# Altium PCB sensor_node1.PcbDoc
Units mil, origin at the board's own origin, x right, y up, seen from the top; angles counter-clockwise.
Board outline 3200 x 2200 mil, 2 copper layers (Top Layer, Bottom Layer); 26 components, 32 nets, 130 pads, 44 vias.
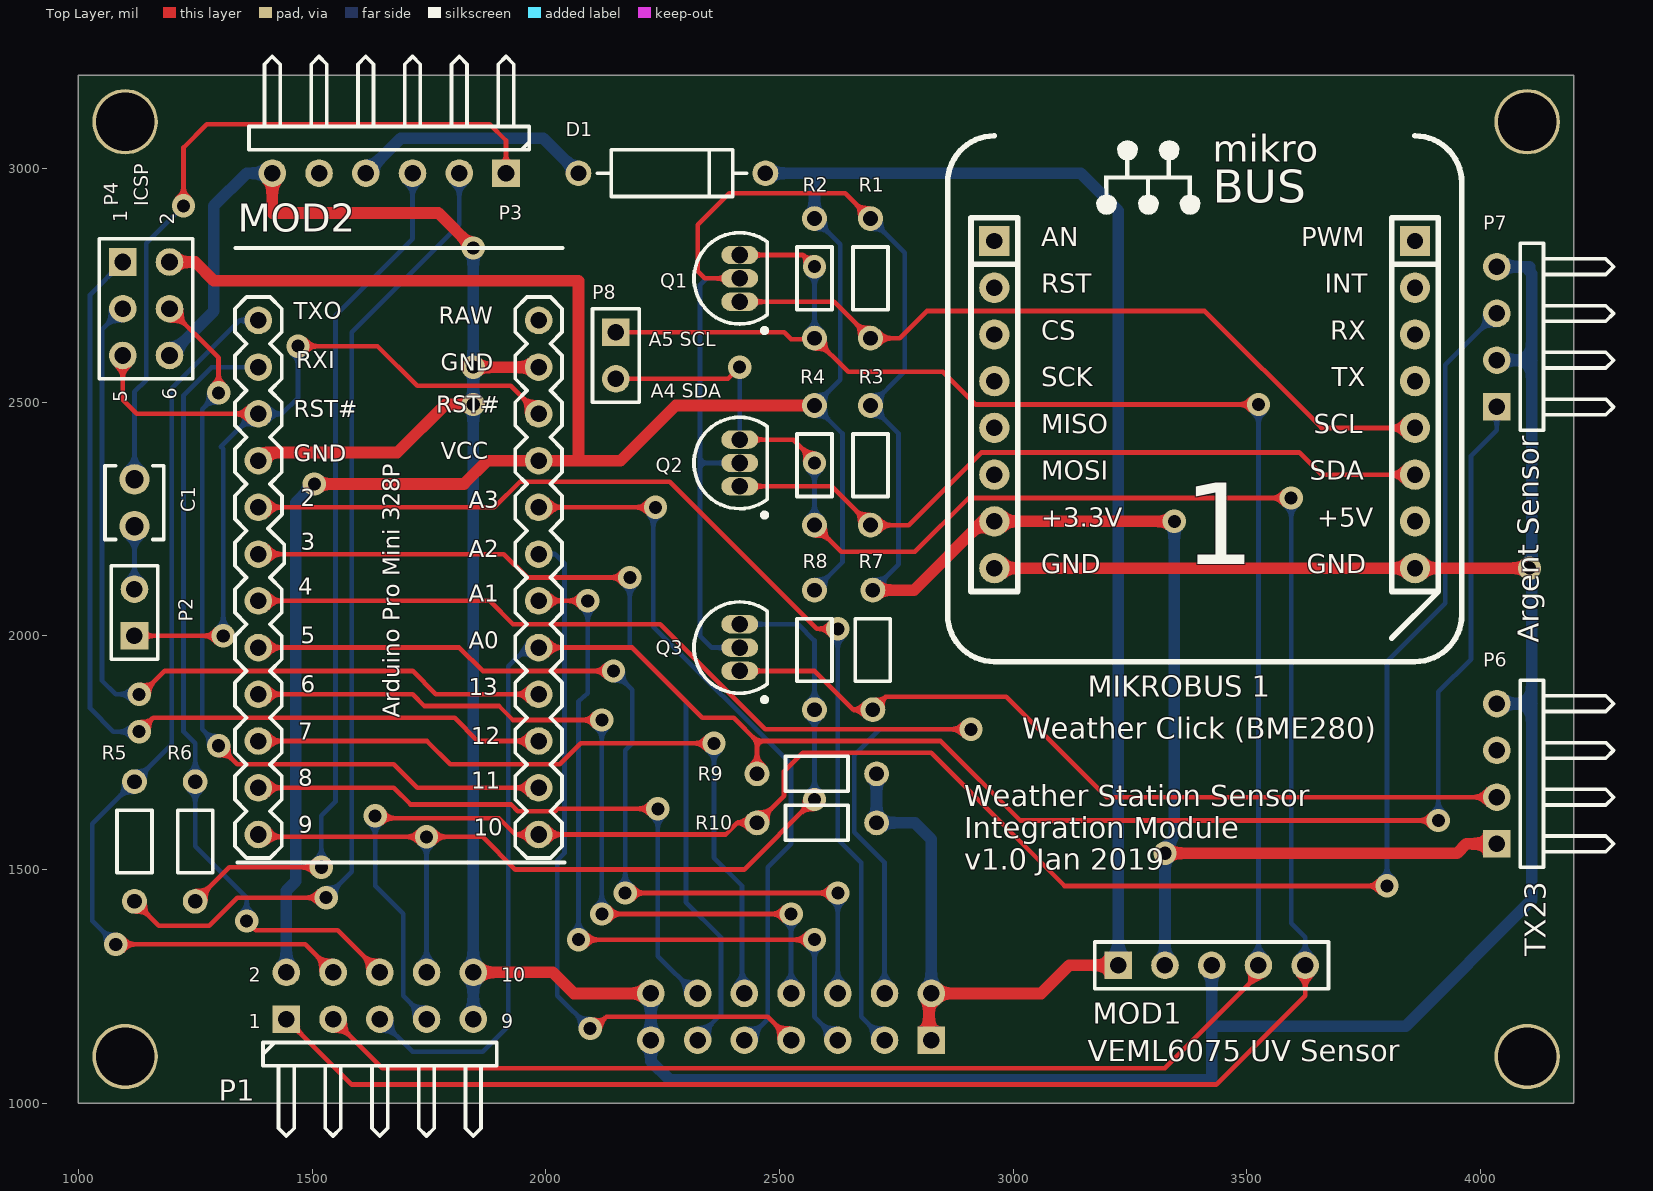
[diagram p0: Top Layer view]
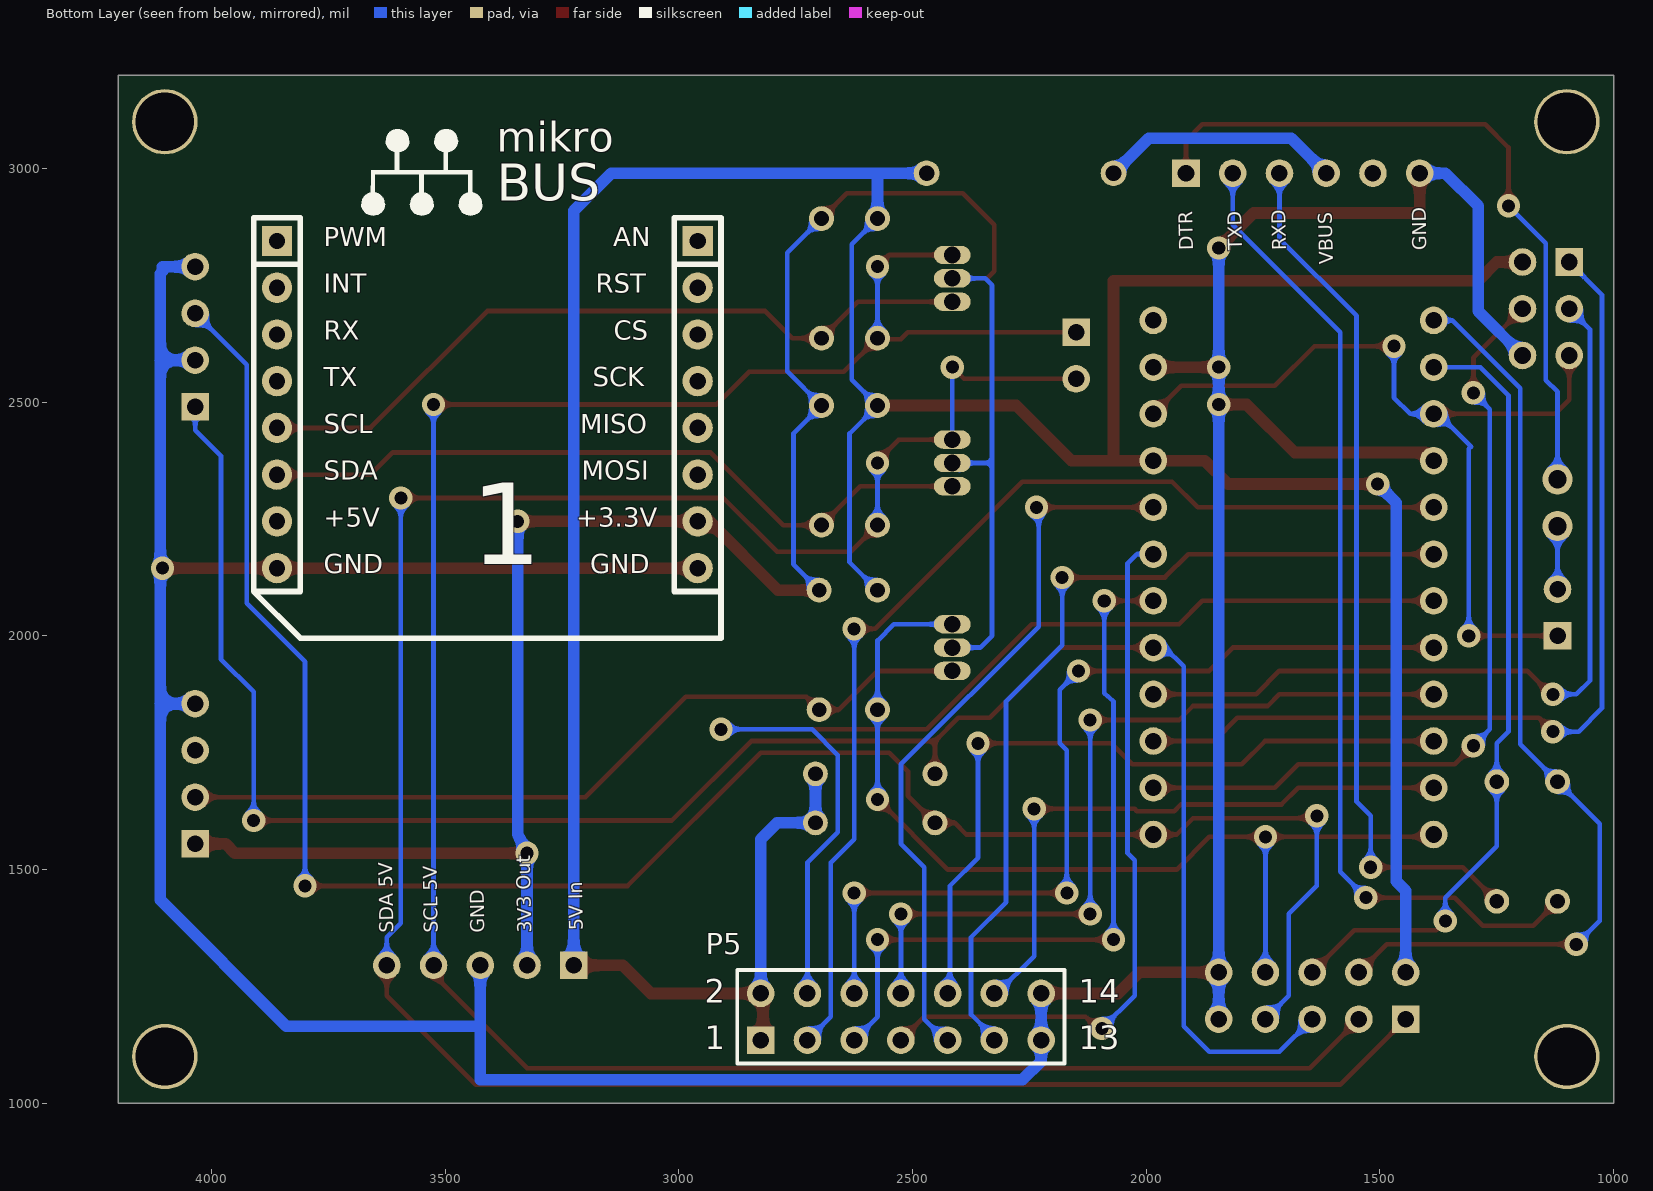
[diagram p1: Bottom Layer view, seen from below]

## Layer stack, top to bottom
Top Solder: solder mask 0.4, Solder Resist, Dk 3.5
Top Layer: signal copper 1.4
Dielectric 1: dielectric 12.6, FR-4, Dk 4.8
Bottom Layer: signal copper 1.4
Bottom Solder: solder mask 0.4, Solder Resist, Dk 3.5

## Board outline
1000,1000 1000,3200 4200,3200 4200,1000

## Design rules (kind name [scope] priority, off if disabled: settings)
Clearance [All] p1: gap=10
HoleSize [All] p1: absolutevalues=TRUE maxlimit=200 minlimit=1 maxpercent=80.000 minpercent=20.000
MinimumSolderMaskSliver [All] p1: minsoldermaskwidth=2
PolygonConnect [All] p1: connectstyle=Relief reliefconductorwidth=10 reliefentries=4 polygonreliefangle="90 Angle" airgapwidth=10
RoutingVias [All] p1: holewidth=28 width=50 viastyle="Through Hole" minholewidth=28 minwidth=50 maxholewidth=28 maxwidth=50
SilkToSilkClearance [All] p1: silktosilkclearance=5
SilkToSolderMaskClearance [IsPad] p1: minsilkscreentomaskgap=2 clearancetoexposedcopper=TRUE
SolderMaskExpansion [All] p1: expansion=4
Width [All] p1: maxlimit=30 minlimit=6 preferedwidth=10
26 further rules are at their usual default settings.

## Components (designator, comment, footprint, x,y, rotation, side; value= is the part's Value field where it differs from the comment)
C1 "Cap" CAPR2.54-4x3.2 1120,2285 r270 top
D1 "1N5817" DIODE-0.4 2270,2990 r0 top
"MIKROBUS 1" "MIKROBUS HOST CONN." "MIKROBUS HOST CONN." 2960,2845 r0 top
MOD1 "veml6075_ada" HDR1X5 3225,1295 r0 top
MOD2 "ProMini 328P" promini 1320.78,2850 r0 top
P1 "Header 5X2H" HDR2X5H 1445,1180 r0 top
P2 "Header 2" HDR1X2 1120,2000 r90 top
P3 "Header 6H" HDR1X6H 1915,2990 r180 top
P4 "Header 3X2" HDR2X3 1095,2800 r270 top
P5 "Header 7X2" HDR2X7 2825,1135 r180 bottom
P6 "Header 4H" HDR1X4H 4035,1555 r90 top
P7 "Header 4H" HDR1X4H 4035,2490 r90 top
P8 "Header 2" HDR1X2 2150,2650 r270 top
Q1 "2N7000" 2N7000-TO92 2415,2765 r0 top
Q2 "2N7000" 2N7000-TO92 2415,2370 r0 top
Q3 "2N7000" 2N7000-TO92 2415,1975 r0 top
R1 "Res3" RES6.5-3.4X1.9 2695,2765 r90 top
R2 "Res3" RES6.5-3.4X1.9 2575,2765 r270 top
R3 "Res3" RES6.5-3.4X1.9 2695,2365 r90 top
R4 "Res3" RES6.5-3.4X1.9 2575,2365 r270 top
R5 "Res3" RES6.5-3.4X1.9 1120,1560 r270 top
R6 "Res3" RES6.5-3.4X1.9 1250,1560 r270 top
R7 "Res3" RES6.5-3.4X1.9 2700,1970 r90 top
R8 "Res3" RES6.5-3.4X1.9 2575,1970 r270 top
R9 "Res3" RES6.5-3.4X1.9 2580,1705 r180 top
R10 "Res3" RES6.5-3.4X1.9 2580,1600 r180 top

## Footprints (in the part's own frame and the unit in brackets; to place one, negate y for a bottom-side part, rotate by r counter-clockwise, add the part's x,y. Pads: shape width x height; smd on the part's side, far side on the other; paste and mask are expansions set on the pad)
2N7000-TO92 [mm] "TO, Flat Index; 3 In-Line, Axial Leads; Body Dia. 4.5mm; Leads 0.51 x 0.48 mm (max)"
  oval 2x1 hole 0.9: 1(0,-1.27) 2(0,0) 3(0,1.27)
  silkscreen extent -2.48,-2.95 1.5,2.48, body extent -2.48,-2.5 1.5,2.5, height 6.86
CAPR2.54-4x3.2 [mm] "Capacitor, Ceramic, Thru-Hole, Dipped Radial; Body 4 x 3.2 mm (WxT) Pin Spacing 2.54 mm (typ)"
  round 1.65 hole 1: 1(-1.27,0) 2(1.27,0)
  silkscreen extent -2,-1.6 2,1.6
DIODE-0.4 [mm] "Diode, Thru-Hole; 2 Leads; 0.4 in Pin Spacing"
  round 1.4 hole 0.85: 1(-5.08,0) 2(5.08,0)
  silkscreen extent -4.06,-1.27 4.06,1.27
HDR1X2 [mm] "Connector; Header; 2 Position"
  rect 1.5x1.5 hole 0.9: 1(0,0)
  round 1.5 hole 0.9: 2(2.54,0)
  silkscreen extent -1.27,-1.27 3.81,1.27
HDR1X4H [mm] "Connector; Header; 4 Position; Right Angle"
  rect 1.5x1.5 hole 0.9: 1(0,0)
  round 1.5 hole 0.9: 2(2.54,0) 3(5.08,0) 4(7.62,0)
  silkscreen extent -1.27,-6.35 8.89,-1.27
HDR1X5 [mm] "Connector; Header; 5 Position"
  rect 1.5x1.5 hole 0.9: 1(0,0)
  round 1.5 hole 0.9: 2(2.54,0) 3(5.08,0) 4(7.62,0) 5(10.16,0)
  silkscreen extent -1.27,-1.27 11.43,1.27
HDR1X6H [mm] "Connector; Header; 6 Position; Right Angle"
  rect 1.5x1.5 hole 0.9: 1(0,0)
  round 1.5 hole 0.9: 2(2.54,0) 3(5.08,0) 4(7.62,0) 5(10.16,0) 6(12.7,0)
  silkscreen extent -1.27,-6.35 13.97,-1.27
HDR2X3 [mm] "Connector; Header; 3x2 Position"
  rect 1.5x1.5 hole 0.9: 1(0,0)
  round 1.5 hole 0.9: 2(0,2.54) 3(2.54,0) 4(2.54,2.54) 5(5.08,0) 6(5.08,2.54)
  silkscreen extent -1.27,-1.27 6.35,3.81
HDR2X5H [mm] "Connector; Header; 5x2 Position; Right Angle"
  rect 1.5x1.5 hole 0.9: 1(0,0)
  round 1.5 hole 0.9: 2(0,2.54) 3(2.54,0) 4(2.54,2.54) 5(5.08,0) 6(5.08,2.54) 7(7.62,0) 8(7.62,2.54) 9(10.16,0) 10(10.16,2.54)
  silkscreen extent -1.27,-6.35 11.43,-1.27
HDR2X7 [mm] "Connector; Header; 7x2 Position"
  rect 1.5x1.5 hole 0.9: 1(0,0)
  round 1.5 hole 0.9: 2(0,2.54) 3(2.54,0) 4(2.54,2.54) 5(5.08,0) 6(5.08,2.54) 7(7.62,0) 8(7.62,2.54) 9(10.16,0) 10(10.16,2.54) 11(12.7,0) 12(12.7,2.54) 13(15.24,0) 14(15.24,2.54)
  silkscreen extent -1.27,-1.27 16.51,3.81
"MIKROBUS HOST CONN." [mil]
  rect 65x65 hole 35: 1(0,0) 16(900,0)
  round 65 hole 35: 2(0,-100) 3(0,-200) 4(0,-300) 5(0,-400) 6(0,-500) 7(0,-600) 8(0,-700) 9(900,-700) 10(900,-600) 11(900,-500) 12(900,-400) 13(900,-300) 14(900,-200) 15(900,-100)
  silkscreen extent -100,-900 1000,225, body extent -49,-755 949,55, height 335
promini [mm]
  round 1.5 hole 0.9: 1(1.631,-4.445) 2(1.631,-6.985) 3(1.631,-9.525) 4(1.631,-12.065) 5(1.631,-14.605) 6(1.631,-17.145) 7(1.631,-19.685) 8(1.631,-22.225) 9(1.631,-24.765) 10(1.631,-27.305) 11(1.631,-29.845) 12(1.631,-32.385) 13(16.871,-32.385) 14(16.871,-29.845) 15(16.871,-27.305) 16(16.871,-24.765) 17(16.871,-22.225) 18(16.871,-19.685) 19(16.871,-17.145) 20(16.871,-14.605) 21(16.871,-12.065) 22(16.871,-9.525) 23(16.871,-6.985) 24(16.871,-4.445)
  silkscreen extent 0.36,-33.91 18.27,-0.51
RES6.5-3.4X1.9 [mm] "Resistor, Axial; Body 3.4 x 1.9 mm (LxDia. max), Lead Dia. 0.5 mm (max)"
  round 1.35 hole 0.8: 1(-3.25,0) 2(3.25,0)
  silkscreen extent -1.7,-0.95 1.7,0.95

## Part data
D1: library part "D Schottky"
"MIKROBUS 1": library part "MIKROBUS HOST CONN._1", "mikroBUS Host Socket"
MOD2: library part promini_328P
P1: "Header, 5-Pin, Dual row, Right Angle"
P5: "Header, 7-Pin, Dual row"
P6 P7: "Header, 4-Pin, Right Angle"
Q1 Q2 Q3: "2N7000 - TO92"
R1 R2 R3 R4 R7 R8 R9 R10: "Resistor"

## Free pads (board coordinates)
  round 140 hole 125: MTG1(1100,1100) MTG1(1100,3100) MTG1(4100,1100) MTG1(4100,3100)

## Via types
v1: diameter 50, hole 28, Top Layer to Bottom Layer, 44 vias

## Nets (pads, with @x,y where several pads share a name; then routed paths per layer and width w, separated by ;. In a path a pad name is that pad's centre, name@x,y a point inside that pad or via, vN(x,y) a via of type N, cw(c..) or ccw(c..) an arc to the next point about the centre after c; other vN are vias at no path point)
A1: MOD2.18 P5.5 | length 1579.8
  Top Layer w10: MOD2.18 v1(2090,2075) ; v1(2070,1350) v1(2575,1350)
  Bottom Layer w10: v1(2070,1350) 2070,1860 2090,1877.5 v1(2090,2075) ; v1(2575,1350) 2575,1185 P5.5
A2: MOD2.19 P5.7 | length 1554.6
  Top Layer w10: v1(2095,1160) 2105,1160 2130,1185 2475,1185 P5.7
  Bottom Layer w10: MOD2.19 2020,2175 2040,2155 2040,1535 2025,1520 2025,1230 v1(2095,1160)
A3: MOD2.20 P5.9 | length 1561.5
  Top Layer w10: MOD2.20 v1(2235,2275)
  Bottom Layer w10: v1@2230,2275 2230,2020 2525,1725 2525,1555 2475,1505 2475,1180 2430,1135 P5.9 P5.9@2420,1135
D2: MOD2.5 P5.3 | length 2314.7
  Top Layer w10: MOD2.5 1890,2275 1945,2330 2265,2330 2580,2015 v1(2625,2015)
  Bottom Layer w10: v1(2625,2015) 2625,1565 2675,1515 2675,1185 P5.3
D3: MOD2.6 P5.11 | length 1909.3
  Top Layer w10: MOD2.6 1910,2175 1960,2125 v1(2180,2125)
  Bottom Layer w10: v1(2180,2125) 2180,1980 2300,1860 2300,1430 2375,1355 2375,1190 P5.11@2320,1135
D4: MOD2.7 P5.4 | length 2448.6
  Top Layer w10: MOD2.7 1880,2075 1930,2025 2245,2025 2470,1800 v1(2910,1800)
  Bottom Layer w10: P5.4 2725,1515 2660,1580 2660,1745 2715,1800 v1(2910,1800)
D5: MOD2.8 P5.6 | length 1948.5
  Top Layer w10: MOD2.8 1815,1975 1865,1925 v1(2145,1925) ; v1(2170,1450) v1(2625,1450)
  Bottom Layer w10: v1(2145,1925) 2185,1885 2185,1770 2170,1755 v1(2170,1450) ; P5.6 v1(2625,1450)
D6: MOD2.9 P5.8 | length 1747.8
  Top Layer w10: MOD2.9 1715,1875 1740,1850 1900,1850 1930,1820 v1(2120,1820) ; v1(2120,1405) v1(2525,1405)
  Bottom Layer w10: v1(2120,1405) v1(2120,1820) ; P5.8 v1(2525,1405)
D7: MOD2.10 P5.10 | length 1574.2
  Top Layer w10: MOD2.10 1745.94,1775 1795.94,1725 2030,1725 2075,1770 v1(2360,1770)
  Bottom Layer w10: v1(2360,1770) 2360,1525 2420,1465 P5.10@2420,1235
D8: MOD2.11 P5.12 | length 1305.9
  Top Layer w10: MOD2.11 1675,1675 1710.67,1639.33 1925.67,1639.33 1940,1625 2020,1625 2025,1630 v1(2240,1630)
  Bottom Layer w10: v1(2240,1630) 2240,1315 P5.12@2320,1235
DIR1: MOD2.17 P1.5 P7.1 R9.2 | length 4263.4
  Top Layer w10: MOD2.17 2185,1975 2335,1825 2402.05,1825 2452.05,1775 ; R9.2 2452.05,1775 ; v1(3910,1605) 3015,1605 2845,1775 2452.05,1775
  Bottom Layer w10: P1.5 1715,1110 1865,1110 1920,1165 1920,1935 1960,1975 MOD2.17 ; v1(3910,1605) 3910,1880 3980,1950 3980,2385 4035,2440 P7.1
DTR: C1.1 P3.1 | length 1548.7
  Top Layer w10: v1(1225,2920) 1225,3045 1275,3095 1880,3095 1915,3060 P3.1
  Bottom Layer w10: C1.1 1120,2522.03 1145,2547.03 1145,2840 v1(1225,2920)
GND: "MIKROBUS 1.8" "MIKROBUS 1.9" MOD1.3 MOD2.4 MOD2.23 P1.9 P1.10 P3.6 P4.6 P5.13 P5.14 P6.4 P7.2 P7.4 | length 8889.7
  Top Layer w25: MOD2.4 1402.5,2392.5 1682.5,2392.5 1785,2495 v1(1845,2495) ; P3.6 1415,2905 1770,2905 v1(1845,2830) ; P1.10 2015,1280 2060,1235 P5.14@2220,1235 ; v1@1850,2575 MOD2.23 ; 2960,2145 3860,2145 v1(4105,2145)
  Bottom Layer w25: P4.6 1290,2695 1290,2920 1360,2990 P3.6 ; P1.9 P1.10 v1(1845,2495) v1(1845,2575) v1@1845,2580 ; v1(1845,2830) v1@1845,2580 ; v1@1850,2575 v1@1845,2580 ; P5.14@2220.01,1234.75 P5.14@2220,1235 ; P5.14 P5.13 2225,1090 2265,1050 3425,1050 MOD1.3 MOD1.3@3435,1285 ; 3435,1165 3840,1165 4110,1435 4110,1855 ; P6.4 4110,1855 ; P7.2 4110,2590 ; P7.4 4105,2790 4105,2780 4110,2775 4110,2590 ; v1(4105,2145) v1@4110,2145 ; 4110,1855 v1@4110,2145 ; v1@4110,2145 4110,2590
MISO: MOD2.15 P4.1 | length 1994.3
  Top Layer w10: v1@1132.5,1797.5 1160,1825 1805,1825 1855,1775 MOD2.15
  Bottom Layer w10: P4.1 1025,2730 1025,1845 1075,1795 v1(1130,1795)
MOSI: MOD2.14 P4.4 | length 1729.8
  Top Layer w10: P4.4 1300,2595 v1(1300,2520) ; v1(1300,1765) 1340,1725 1675,1725 1725,1675 MOD2.14
  Bottom Layer w10: v1(1300,1765) 1265,1800 1265,2485 v1(1300,2520)
NetC1_2: C1.2 P2.2 | length 129.1
  Bottom Layer w10: P2.2@1110,2110 1120,2120 C1.2
RST#: MOD2.3 MOD2.22 P2.1 P4.5 | length 1888.1
  Top Layer w10: P4.5 1095,2505 1125,2475 MOD2.3 ; P2.1 v1(1310,2000) ; v1(1470,2620) 1640,2620 1725,2535 1925,2535 MOD2.22
  Bottom Layer w10: v1(1310,2000) 1310,2400 1305,2405 1375,2475 MOD2.3 1435,2475 1470,2510 v1(1470,2620)
RXD: MOD2.2 P1.6 R6.1 | length 1696.3
  Top Layer w10: v1(1360,1390) 1380,1370 1555,1370 P1.6
  Bottom Layer w10: v1(1360,1390) 1360,1440 1250,1550 R6.1 1250,1770 1225,1795 1225,2515 1285,2575 MOD2.2
RXD_R: P3.3 R6.2 | length 1866
  Top Layer w10: R6.2 1322.95,1505 v1(1520,1505)
  Bottom Layer w10: v1(1520,1505) 1520,1615 1550,1645 1550,2685 1715,2850 P3.3
SCK: MOD2.16 P4.3 | length 1804.2
  Top Layer w10: v1@1130,1870 1185,1925 1715,1925 1765,1875 MOD2.16
  Bottom Layer w10: P4.3 1050.47,2655.47 1050.47,1904.53 1080,1875 v1(1130,1875)
SCL_3V3: "MIKROBUS 1.12" Q1.1 R1.1 | length 1604.8
  Top Layer w10: Q1.1 2617.05,2715 R1.1 2757.05,2637.05 2815,2695 3410,2695 3660,2445 3860,2445
SCL_5V: MOD1.4 P1.3 P8.1 Q1.3 R2.2 | length 5065.5
  Top Layer w10: P1.3 1650,1075 3325,1075 3525,1275 MOD1.4 ; P8.1@2175,2650 2510,2650 2525,2635 2572.95,2635 R2.2 2647.05,2565 2850,2565 2920,2495 v1(3525,2495) ; Q1.3 2550,2815 v1(2575,2790)
  Bottom Layer w10: R2.2 v1(2575,2790) ; MOD1.4 v1(3525,2495)
SDA_3V3: "MIKROBUS 1.11" Q2.1 R3.1 | length 1563.4
  Top Layer w10: Q2.1 2612.05,2320 R3.1 2777.05,2237.05 2932.5,2392.5 3612.5,2392.5 3660,2345 3860,2345
SDA_5V: MOD1.5 P1.1 P8.2 Q2.3 R4.2 | length 5207.3
  Top Layer w10: P1.1 1585,1040 3435,1040 3625,1230 MOD1.5 ; P8.2@2175,2550 2390,2550 v1(2415,2575) ; Q2.3 2530,2420 2575,2375 v1(2575,2370) ; R4.2 2632.05,2180 2790,2180 2905,2295 v1(3595,2295)
  Bottom Layer w10: Q2.3 v1(2415,2575) ; R4.2 v1(2575,2370) ; v1(3595,2295) 3595,1385 3625,1355 MOD1.5
SPEED1: MOD2.13 P1.7 P7.3 R10.2 | length 4205.5
  Top Layer w10: v1(1635,1615) 1640,1610 1900,1610 1935,1575 MOD2.13 2385,1575 2410,1600 R10.2 2510,1657.95 2510,1710 2550,1750 2825,1750 3110,1465 v1(3800,1465)
  Bottom Layer w10: v1(1635,1615) 1635,1465 1695,1405 1695,1230 P1.7 ; v1(3800,1465) 3800,1945 3925,2070 3925,2580 P7.3
TX23_3V3: P6.2 Q3.1 R7.1 | length 1755
  Top Layer w10: Q3.1 2575,1925 2657.95,1842.05 R7.1 2727.95,1870 2985,1870 3200,1655 P6.2
TX23_5V: MOD2.12 P1.8 Q3.3 R8.2 | length 2087.7
  Top Layer w10: MOD2.12 1390,1570 v1(1745,1570) 1865,1570 1935,1500 2425,1500 v1(2575,1650)
  Bottom Layer w10: P1.8 v1(1745,1570) ; Q3.3 2540,2025 2575,1990 R8.2 v1(2575,1650)
TXD: MOD2.1 P1.4 R5.1 | length 2021
  Top Layer w10: v1@1075,1340 v1(1080,1340) 1485,1340 P1.4
  Bottom Layer w10: v1(1080,1340) 1030,1390 1030,1597.95 R5.1 1200,1767.95 1200,2530 1345,2675 MOD2.1
TXD_R: P3.2 R5.2 | length 2124.5
  Top Layer w10: R5.2 1172.05,1380 1280,1380 1340,1440 v1(1530,1440)
  Bottom Layer w10: v1(1530,1440) 1585,1495 1585,2650 1815,2880 P3.2
VBUS: D1.1 P3.4 | length 517.1
  Bottom Layer w25: P3.4 1690,3065 1995,3065 D1.1
VCC_3V3: "MIKROBUS 1.7" MOD1.2 P6.1 Q1.2 Q2.2 Q3.2 R1.2 R3.2 R7.2 | length 4941.9
  Top Layer w10: Q1.2 2340,2765 2325,2780 2325,2880 2392.44,2947.44 2640.51,2947.44 R1.2
  Top Layer w25: R7.2 2787.95,2097.95 2935,2245 2960,2245 v1(3345,2245) ; v1(3325,1535) 3950,1535 3970,1555 P6.1
  Bottom Layer w10: Q2.2@2399.68,2354.68 Q2.2 2330,2370 ; Q3.2 2355,1975 2330,2000 2330,2370 ; Q1.2 2345,2765 2330,2750 2330,2370 ; R1.2 2767.95,2820 2767.95,2565.91 R3.2 2755,2432.95 2755,2152.95 R7.2
  Bottom Layer w25: MOD1.2 v1(3325,1535) 3345,1575 v1(3345,2245)
VCC_5V: D1.2 MOD1.1 MOD2.21 P1.2 P4.2 P5.1 P5.2 R2.1 R4.1 R8.1 R9.1 R10.1 | length 7979.9
  Top Layer w25: P4.2 1250,2800 1290,2760 2070,2760 2070,2375 MOD2.21 1875,2375 1825,2325 v1(1505,2325) ; 2065,2375 2160,2375 2277.95,2492.95 R4.1 ; P5.1@2820,1135 2820,1235 P5.2 3060,1235 3120,1295 MOD1.1
  Bottom Layer w10: R8.1 2635,2157.95 2635,2432.95 R4.1 2630,2547.95 2630,2837.95 R2.1
  Bottom Layer w25: P1.2 1445,1455 1465,1475 1465,2285 v1(1505,2325) ; D1.2 2570,2990 ; R2.1 2575,2985 2570,2990 ; R9.1 R10.1 2790,1600 2825,1565 P5.2 ; MOD1.1 3225,2910 3145,2990 2570,2990
pads on no net: "MIKROBUS 1.1" "MIKROBUS 1.2" "MIKROBUS 1.3" "MIKROBUS 1.4" "MIKROBUS 1.5" "MIKROBUS 1.6" "MIKROBUS 1.10" "MIKROBUS 1.13" "MIKROBUS 1.14" "MIKROBUS 1.15" "MIKROBUS 1.16" MOD2.24 P3.5 P6.3

## Silkscreen, mask and mechanical layers (free items; w line width, h text height)
Top Overlay:
  text "ICSP" at 1150,2919.36 h30 r90
  text "A5 SCL" at 2220,2620 h30
  text "A4 SDA" at 2225,2510 h30
  text "Argent Sensor" at 4125,1985 h45 r90
  text "Weather Click (BME280)" at 3020,1780 h45
  text "Weather Station Sensor / Integration Module / v1.0 Jan 2019" at 2895,1500 h45
  text "TX23" at 4140,1315 h45 r90
  text "VEML6075 UV Sensor" at 3160,1090 h45
Bottom Overlay:
  text "GND" at 1400,2824.98 h30 r268.81
  text "RXD" at 1700,2824.98 h30 r268.81
  text "TXD" at 1795,2824.98 h30 r268.81
  text "DTR" at 1900,2824.98 h30 r268.81
  text "VBUS" at 1600,2795 h30 r268.81
  text "5V In" at 3205,1370 h30 r268.81
  text "3V3 Out" at 3315,1365 h30 r268.81
  text "GND" at 3415,1365 h30 r268.81
  text "SCL 5V" at 3515,1365 h30 r268.81
  text "SDA 5V" at 3610,1365 h30 r268.81
Mechanical 13:
  the board outline again, w10

## Text inside footprints (layer, text, board x,y; h text height)
"MIKROBUS 1": Top Overlay "SDA" at 3634.28,2320 h70; Top Overlay "RST" at 3060,2720 h70; Top Overlay "CS" at 3060,2620 h70; Top Overlay "MISO" at 3060,2420 h70; Top Overlay "SCK" at 3060,2520 h70; Top Overlay "MOSI" at 3060,2320 h70; Top Overlay "+3.3V" at 3060,2220 h70; Top Overlay "GND" at 3060,2120 h70; Top Overlay "SCL" at 3643.48,2420 h70; Top Overlay "INT" at 3666.49,2720 h70; Top Overlay "RX" at 3678.67,2620 h70; Top Overlay "TX" at 3682.17,2520 h70; Top Overlay "GND" at 3628,2120 h70; Top Overlay "+5V" at 3651,2220 h70; Top Overlay "AN" at 3060,2820 h70; Top Overlay "PWM" at 3616.79,2820 h70; Top Overlay "mikro" at 3427,2995.54 h99; Top Overlay "BUS" at 3427,2903.51 h121.5; Top Overlay "1" at 3365,2095 h300; Bottom Overlay "mikro" at 3390,3015 h110; Bottom Overlay "BUS" at 3390,2905 h135; Bottom Overlay "PWM" at 3760,2820 h70; Bottom Overlay "+5V" at 3760,2220 h70; Bottom Overlay "GND" at 3760,2120 h70; Bottom Overlay "TX" at 3760,2520 h70; Bottom Overlay "RX" at 3760,2620 h70; Bottom Overlay "INT" at 3760,2720 h70; Bottom Overlay "SCL" at 3760,2420 h70; Bottom Overlay "SDA" at 3760,2320 h70; Bottom Overlay "AN" at 3140.36,2820 h70; Bottom Overlay "GND" at 3190,2120 h70; Bottom Overlay "+3.3V" at 3220,2220 h70; Bottom Overlay "MOSI" at 3208.27,2320 h70; Bottom Overlay "SCK" at 3184.23,2520 h70; Bottom Overlay "MISO" at 3211.12,2420 h70; Bottom Overlay "CS" at 3139,2620 h70; Bottom Overlay "RST" at 3177.49,2720 h70; Bottom Overlay "1" at 3445,2095 h300
MOD2: Top Overlay "Arduino Pro Mini 328P" at 1700.78,1825 h62 r90; Top Overlay "RAW" at 1770.78,2655 h62; Top Overlay "GND" at 1775.78,2555 h62; Top Overlay "RST#" at 1765.78,2465 h62; Top Overlay "VCC" at 1775.78,2365 h62; Top Overlay "GND" at 1460.78,2360 h62; Top Overlay "RST#" at 1460.78,2455 h62; Top Overlay "RXI" at 1465.78,2560 h62; Top Overlay "9" at 1470.78,1565 h62; Top Overlay "8" at 1470.78,1665 h62; Top Overlay "7" at 1470.78,1765 h62; Top Overlay "6" at 1475.78,1865 h62; Top Overlay "5" at 1475.78,1970 h62; Top Overlay "4" at 1470.78,2075 h62; Top Overlay "3" at 1475.78,2170 h62; Top Overlay "2" at 1475.78,2265 h62; Top Overlay "TXO" at 1460.78,2665 h62; Top Overlay "A3" at 1835.78,2260 h62; Top Overlay "A2" at 1835.78,2155 h62; Top Overlay "A1" at 1835.78,2060 h62; Top Overlay "A0" at 1835.78,1960 h62; Top Overlay "13" at 1835.78,1860 h62; Top Overlay "12" at 1840.78,1755 h62; Top Overlay "11" at 1840.78,1660 h62; Top Overlay "10" at 1845.78,1560 h62
P1: Top Overlay "10" at 1905,1260 h30; Top Overlay "9" at 1905,1160 h30; Top Overlay "1" at 1365,1160 h30; Top Overlay "2" at 1365,1260 h30
P4: Top Overlay "6" at 1210,2505 h30 r90; Top Overlay "5" at 1105,2500 h30 r90; Top Overlay "2" at 1205,2880 h30 r90; Top Overlay "1" at 1105,2885 h30 r90
P5: Bottom Overlay "2" at 2945,1215 h50; Bottom Overlay "1" at 2945,1115 h50; Bottom Overlay "14" at 2145,1215 h50; Bottom Overlay "13" at 2145,1115 h50